# Altium PCB TSAL_ControlV2.1.PcbDoc (part 3 of 3)
Units mm, origin at the board's own origin, x right, y up, seen from the top; angles counter-clockwise.
Board outline 110 x 55.6 mm, 4 copper layers (Top Layer, GND, PWR, Bottom Layer), stack 1.488 mm thick; 168 components, 77 nets, 452 pads, 194 vias.
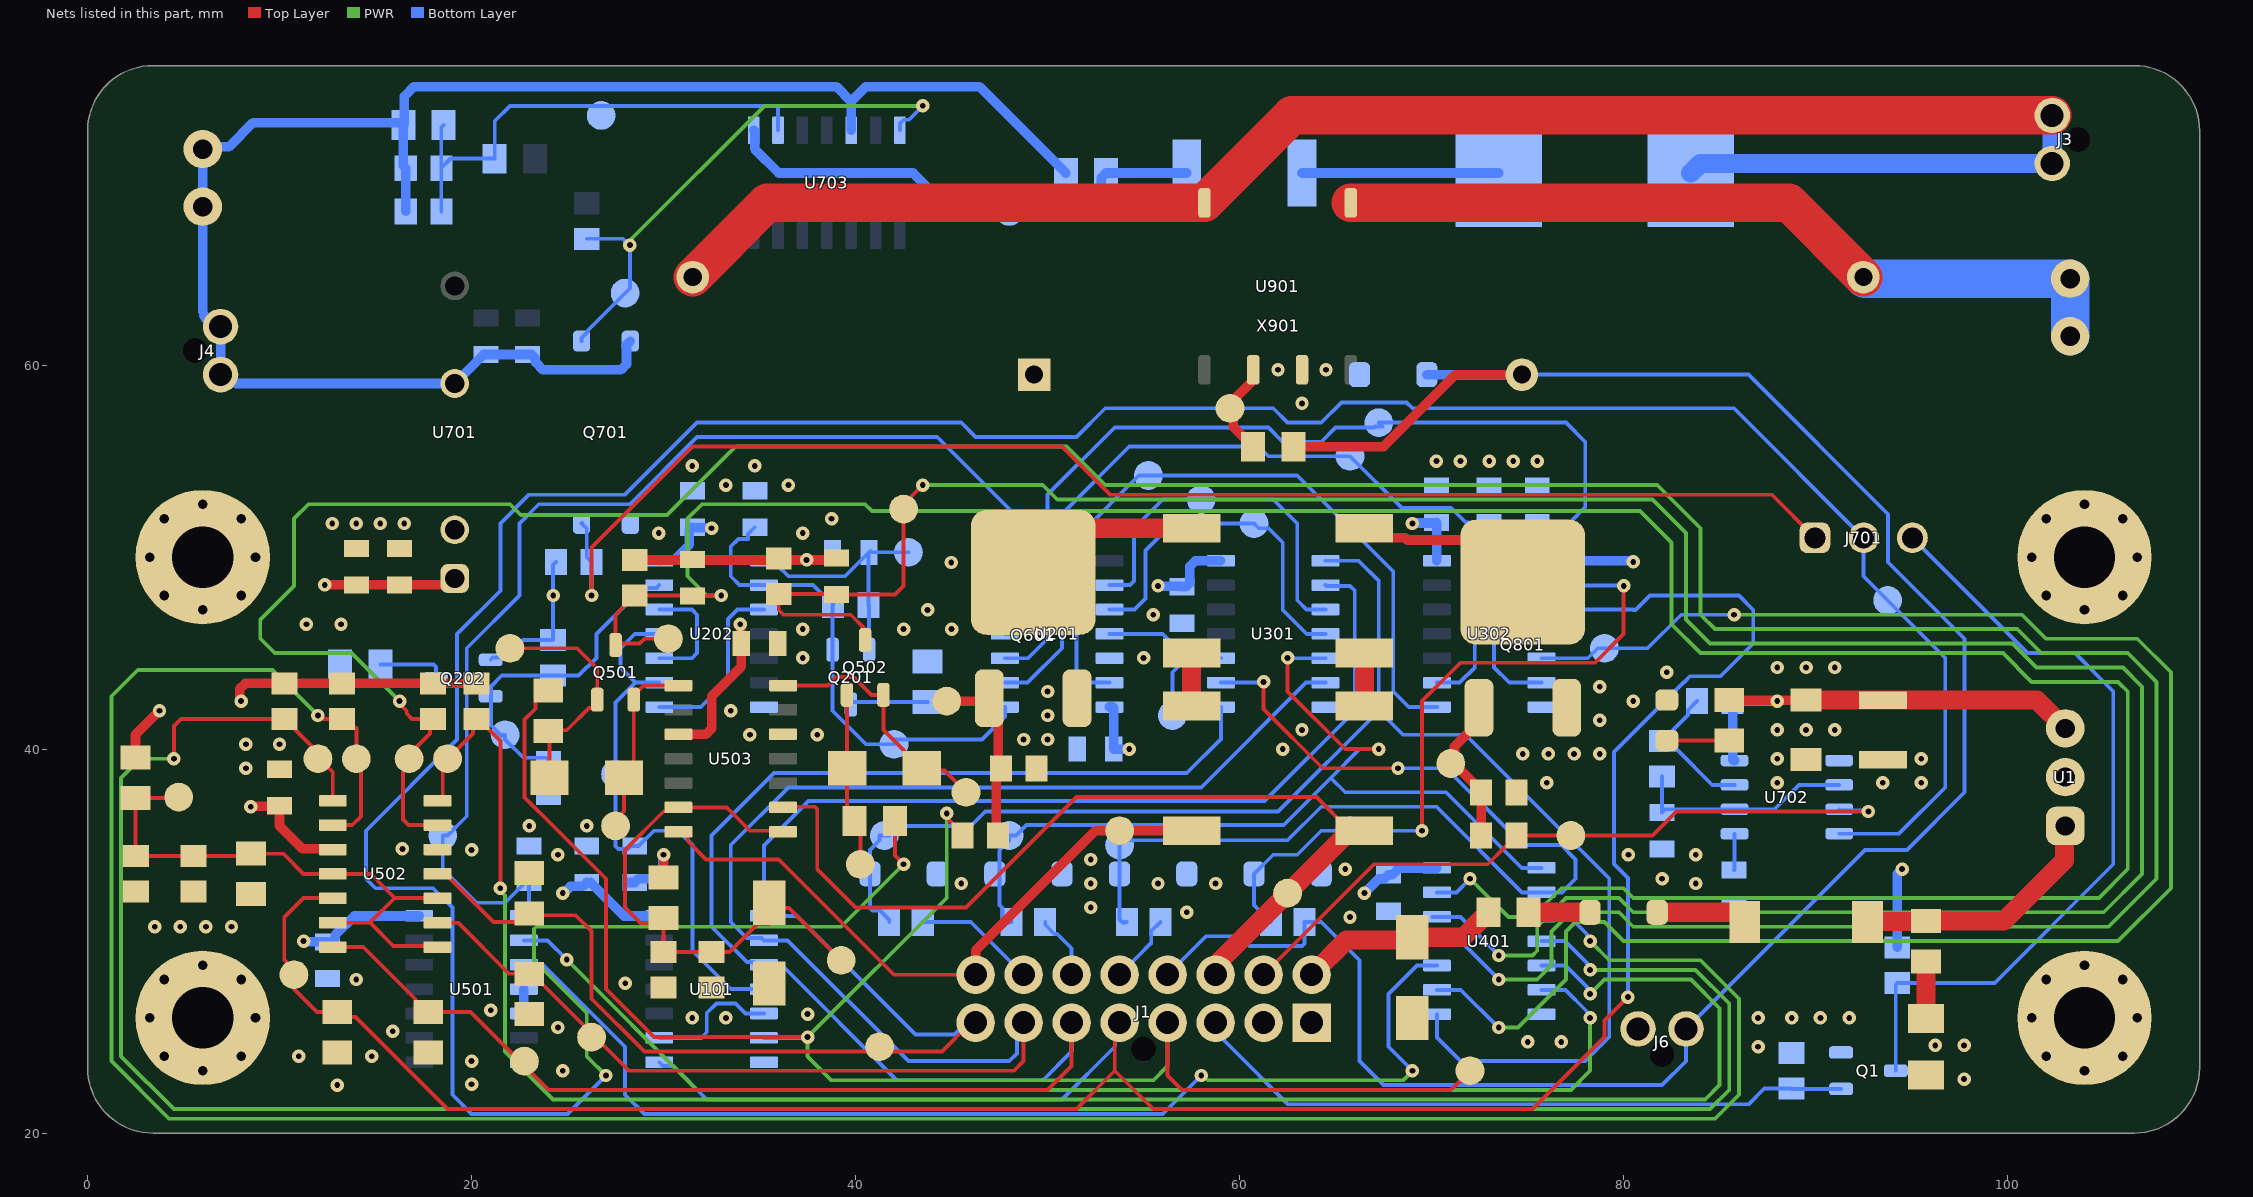
[diagram p4: the nets of this part, all layers, seen from the top]

## Via types
v1: diameter 0.7, hole 0.3, Top Layer to Bottom Layer, tented both sides, 158 vias
v2: diameter 0.7, hole 0.5, Top Layer to Bottom Layer, tented both sides, 32 vias
v3: diameter 1.5, hole 1.5, Top Layer to Bottom Layer, tented both sides, 4 vias

## Nets (pads, with @x,y where several pads share a name; then routed paths per layer and width w, separated by ;. In a path a pad name is that pad's centre, name@x,y a point inside that pad or via, vN(x,y) a via of type N, cw(c..) or ccw(c..) an arc to the next point about the centre after c; other vN are vias at no path point) (continued)
+12: C3.1 C4.1 C101.1 C111.2 C203.1 C204.1 C301.1 C302.1 C401.1 C501.1 C502.1 C503.1 C504.1 C505.1 C703.1 C704.1 J1.7 Q202.G R1.1 R11.1 R202.1 R501.1 R502.1 R503.1 R504.1 R505.1 R511.1 R512.1 R513.1 R702.1 R703.1 U1.3 U101.14 U201.14 U202.14 U301.14 U302.1 U302.14 U401.14 U501.14 U502.3 U503.3 U701.1 U702.8 | length 123.5
  Top Layer w0.5: R505.1@2.5,39.55 2.5,40.75 v1(3.75,42) ; v1(8,42.5) 8,42.554 7.925,42.629 7.925,43.132 8.218,43.425 R502.1@13.25,43.425 R504.1@18,43.425 R503.1@20.25,43.425 ; v1(8.5,37) 8.525,37.025 9.975,37.025 C504.1@10,37.05 10,36 11.18,34.82 12.725,34.82 U502.3@12.775,34.77 ; v1(12.35,48.55) C703.1@14,48.55 C704.1@16.25,48.55 18.795,48.55 U701.1@19.125,48.88 ; R512.1@28.5,49.85 C501.1@31.5,49.85 ; R511.1@30,33.3 v1(30,34.5) ; U503.3@30.775,40.77 32.207,40.77 32.5,41.063 32.5,42.75 34.05,44.3 C505.1@34.05,45.5 34.025,45.525 34.025,46.475 v1(34,46.5) ; C501.1@31.5,49.875 C501.1@31.5,49.85 ; v1@32.5,51.446 v1(32.5,51.5) ; R513.1@36,49.925 R513.1@36,49.85 ; C502.1@39,49.95 38.9,49.85 v1(37.45,49.85) R513.1@36,49.85 ; R11.1@85.5,42.55 C3.1@89.5,42.55 ; C501.1@31.5,49.85 R513.1@36,49.85
  Top Layer w1: C3.1@89.5,42.55 C4.1@93.5,42.55 101.53,42.55 U1.3@103,41.08
  Bottom Layer w0.2: Q202.G@21,44.65 21.115,44.765 21.765,44.765 22.675,45.675 R202.1@24.25,45.675 24.25,47.75 v1(24.25,48) 24.25,49.6 R702.1@24.4,49.75
  Bottom Layer w0.5: v1(11.25,30) 11.275,29.975 12.475,29.975 C503.1@12.5,29.95 12.7,29.95 12.9,30.15 12.9,30.314 13.896,31.31 U501.14@17.275,31.31 ; v1(24.75,32.5) 24.793,32.5 25.143,32.85 25.8,32.85 C101.1@26,33.05 ; C101.1@26.2,33.05 27.94,31.31 U101.14@29.775,31.31 ; C111.2@28.1,33.05 C111.2@28.5,33.05 28.7,33.25 29.4,33.25 29.962,33.812 29.962,34.462 v1(30,34.5) ; U202.14@29.775,49.81 29.825,49.86 30.56,49.86 31.343,50.643 31.343,51.393 C204.1@31.5,51.55 31.525,51.525 32.475,51.525 v1(32.5,51.5) ; U201.14@53.225,42.19 53.4,42.19 53.45,42.14 C203.1@53.45,40 v1(54.25,40) ; v1(55.75,48.5) 55.775,48.475 56.975,48.475 C301.1@57,48.45 57.2,48.45 57.4,48.65 57.4,48.94 57.403,48.943 57.403,49.517 57.696,49.81 U301.14@59.025,49.81 ; v1(66.5,32.5) 67.25,33.25 67.55,33.25 C401.1@67.75,33.45 67.95,33.45 68.31,33.81 U401.14@70.275,33.81 ; v1(69,51.75) 69.025,51.775 70.225,51.775 C302.1@70.25,51.8 70.275,51.775 U302.14@70.275,49.81 ; U302.1@75.725,49.81 80.44,49.81 v1(80.5,49.75) ; U702.8@85.775,39.405 85.725,39.405 85.675,39.455 R703.1@85.675,42.5 v1(88,42.5) ; R1.1@94.25,29.675 94.25,33.5 v1(94.5,33.75)
  other v1: 88,41 89.5,41 91,41 88,44.25 89.5,44.25 91,44.25
AIR+_Coil: A+Coil.1 R3.2 U301.1 U401.8 Z1.K | length 79.1
  Bottom Layer w0.2: R3.2@41.75,31 41.75,31.12 41.275,31.595 40.867,31.595 40.75,31.713 40.75,34.75 41.25,35.25 41.25,35.5 41.767,35.5 42.267,36 46,36 46.75,36.75 62,36.75 67.25,42 ; U301.1@64.475,49.81 66.19,49.81 67.25,48.75 67.25,42 ; U401.8@70.275,26.19 70.275,24.975 71.5,23.75 78,23.75 79.25,25 79.25,33.265 71.765,40.75 68.5,40.75 67.25,42
AIR+_Coil_30V: J1.10 R3.1 | length 6.4
  Bottom Layer w0.2: R3.1@43.5,31 46,31 J1.10@48.75,28.25
AIR+_Implausibility: A+Imp.1 U201.9 U301.3 | length 19.4
  Bottom Layer w0.2: U201.9@53.225,48.54 54.29,48.54 54.5,48.75 54.5,51.5 56,53 A+Imp.1@58,53 61.75,53 63,51.75 63,47.75 63.48,47.27 U301.3@64.475,47.27
AIR+_SCS: A+*.1 R504.2 U401.11 U502.13 | length 185
  Top Layer w0.2: v1(16.25,42.5) 16.25,42.365 16.629,41.986 16.629,41.846 16.9,41.575 R504.2@18,41.575 17.832,41.407 17.832,40.817 16.501,39.487 16.501,38.899 16.425,38.823 16.425,36.325 16.71,36.04 U502.13@18.225,36.04 ; A+*.1@16.57,39.5 A+*.1@16.75,39.5
  PWR w0.2: v1(16.25,42.5) 13.75,45 9.75,45 9,45.75 9,46.75 10.75,48.5 10.75,52 11.5,52.75 22,52.75 22.565,52.185 30.185,52.185 33.75,55.75 51,55.75 53,53.75 81.75,53.75 84,51.5 84,47 84.75,46.25 100.5,46.25 101.75,45 106.25,45 107.75,43.5 107.75,33.25 105.25,30.75 80.5,30.75 79.75,31.5 77.25,31.5 76.25,30.5 76.25,28.75 75.5,28 v1(73.5,28)
  Bottom Layer w0.2: U401.11@70.275,30 71.5,30 v1(73.5,28)
AIR+_State: A+St.1 J1.1 R519.1 U101.1 U301.2 U502.11 | length 94.2
  Top Layer w0.2: U502.11@18.225,33.5 18.65,33.5 21.15,31 22.55,31 R519.1@23,31.45 23.1,31.35 25.418,31.35 26.25,30.518 26.25,27 29,24.25 40.483,24.25 40.484,24.251 41.001,24.251 41.125,24.375 A+St.1@41.25,24.5 ; A+St.1@41.15,24.35 41.249,24.251 42.016,24.251 42.017,24.25 44.5,24.25 46,25.75 J1.1@46.25,25.75
  Bottom Layer w0.2: J1.1@46.25,25.75 45.763,25.75 45.143,25.131 43.119,25.131 36.94,31.31 U101.1@35.225,31.31 35.225,34.975 37.55,37.3 61.3,37.3 66,42 66,48.25 65.75,48.5 64.515,48.5 U301.2@64.475,48.54
AIR-_Coil: A-Coil.1 R5.2 U301.5 U401.1 Z2.K | length 48.9
  Top Layer w0.2: v1(62.5,44.75) 62.5,43 65.5,40 v1(67.25,40)
  Bottom Layer w0.2: Z2.K@47.497,33.253 47.497,34.733 48,35.235 A-Coil.1@48,35.5 48.352,35.5 48.902,36.05 62.3,36.05 64.75,38.5 ; Z2.K@47.5,33.25 47.5,31.875 47.65,31.725 47.65,31.225 47.938,30.937 48,31 R5.2@48.125,31 ; v1(62.5,44.75) 62.52,44.73 U301.5@64.475,44.73 ; v1(67.25,40) 66.25,40 64.75,38.5 ; U401.1@75.725,33.81 74.69,33.81 70.75,37.75 65.5,37.75 64.75,38.5
AIR-_Coil_30V: J1.11 R5.1 | length 3.4
  Bottom Layer w0.2: R5.1@49.875,31 49.875,30.85 50.35,30.375 50.5,30.375 51.25,29.625 J1.11@51.25,28.25
AIR-_Implausibility: A-Imp.1 U201.10 U301.4 | length 19
  Bottom Layer w0.2: U201.10@53.225,47.27 54.52,47.27 55.1,47.85 55.1,50.35 56.5,51.75 A-Imp.1@60.75,51.75 60.999,51.501 61.499,51.501 62.25,50.75 62.25,47.25 63.5,46 U301.4@64.475,46
AIR-_SCS: A-*.1 R503.2 U401.5 U502.14 | length 102.7
  Top Layer w0.2: U502.14@18.225,37.31 18.301,37.31 18.501,37.51 18.501,39.251 20.067,40.817 20.067,41.392 R503.2@20.25,41.575 20.35,41.575 21.5,40.425 v1(21.5,32.75)
  PWR w0.2: v1(21.5,32.75) 21.5,32.633 21.75,32.383 21.75,24.25 24.25,21.75 84.25,21.75 85,22.5 85,26.5 83.5,28 79,28 v1(78.25,27.25)
  Bottom Layer w0.2: U401.5@75.725,28.73 76.97,28.73 78.09,27.61 78.09,27.545 78.25,27.385 v1(78.25,27.25)
AIR-_State: A-St.1 J1.2 R516.1 U101.2 U301.6 U502.9 | length 94.4
  Top Layer w0.2: U502.9@18.225,30.96 19.29,30.96 21.95,28.3 23.15,28.3 26.25,25.2 26.25,25.1 A-St.1@26.25,25 26.35,25.1 28.2,23.25 48.25,23.25 48.75,23.75 J1.2@48.75,25.75
  Bottom Layer w0.2: J1.2@48.75,25.75 48.406,25.406 48.406,24.156 48,23.75 42.75,23.75 36.46,30.04 U101.2@35.225,30.04 35.098,30.167 34.333,30.167 33.5,31 33.5,35 36.5,38 58,38 63.46,43.46 U301.6@64.475,43.46
Discharge_Resistor: J2.1 J2.2 U901.5 X901.1 | length 42.1
  Top Layer w2: U901.5@65.79,68.45 88.61,68.45 X901.1@92.48,64.58
  Bottom Layer w2: X901.1@92.48,64.58 92.56,64.5 J2.2@103.25,64.5 J2.1@103.25,61.5
GateGREEN_DRV: GGreen.1 Q601.G R601.2 R602.1 | length 9.8
  Top Layer w0.5: GGreen.1@44.75,42.5 46.814,42.5 Q601.G@46.964,42.65 46.964,41.832 47.425,41.371 47.425,39.15 R602.1@47.575,39 47.325,38.75 47.325,35.6 R601.2@47.425,35.5
GateGREEN_SCS: GGreen*.1 Q501.G R509.2 Z501.K | length 12.4
  Top Layer w0.2: GGreen*.1@22,45.25 25.5,45.25 26.55,44.2 Q501.G@26.55,42.575 26.55,42.356 26.33,42.135 26.11,42.135 24.958,40.983 24.033,40.983 R509.2@24,40.95 24.06,40.89 Z501.K@24.06,38.5
GateRED_DRV: GRed.1 Q801.G R801.2 R802.1 | length 8.1
  Top Layer w0.5: Q801.G@72.464,42.15 72.464,41.4 71.191,40.127 71.191,39.441 GRed.1@71,39.25 71.175,39.25 R802.1@72.575,37.85 ; R801.2@72.575,35.5 R802.1@72.575,37.85 ; R802.1@72.575,37.75 R802.1@72.575,37.85
GateRED_SCS: GRed*.1 Q502.G R510.1 Z502.K | length 9.1
  Top Layer w0.2: Q502.G@39.55,42.825 39.55,42.575 39.56,42.565 Z502.K@39.56,39 39.56,36.64 R510.1@39.95,36.25 40.25,35.95 GRed*.1@40.25,34
GND: C1.2 C3.2 C4.2 C101.2 C201.2 C202.2 C203.2 C204.2 C223.2 C301.2 C302.2 C333.2 C401.2 C444.2 C503.2 C504.2 C505.2 C555.2 C703.2 C704.2 C705.2 C706.2 D1.2 D3.K D901.A J1.8 J6.1 MH1.1 MH2.1 MH3.1 MH4.1 Q1.S Q601.S Q701.3 Q801.S R2.2 R203.2 R204.2 R506.2 R507.2 R508.2 R514.2 R515.2 R516.2 R517.2 R518.2 R519.2 R602.2 R802.2 U1.2 U101.7 U201.5 U201.7 U201.12 U202.7 U301.7 U302.7 U401.7 U501.4 U501.5 U501.7 U502.12 U503.12 U701.2 U702.1 U901.3 X901.3 Z1.A Z2.A Z3.A Z4.A Z503.A | length 1.3
  Bottom Layer w0.5: U501.5@22.725,26.23 U501.4@22.725,27.5
  other v1: 13,22.5 20,22.55 97.732,22.816 24.75,23.25 20,23.75 11,24 14.8,24 87,24.5 96.232,24.566 97.732,24.566 75,24.75 76.75,24.75 15.9,25.3 24.5,25.5 31.5,26 33.25,26 87,26 88.75,26 90.25,26 91.75,26 37.5,26.2 21,26.4 28,27.8 14,28 3.5,30.75 4.833,30.75 6.167,30.75 7.5,30.75 65.75,31.25 57.25,31.5 52.25,31.75 45.5,33 52.25,33 55.75,33 58.75,33 83.75,33 82,33.25 65.5,33.75 52.25,34.25 24.5,34.5 80.25,34.5 83.75,34.5 20,34.75 16.4,34.8 23,36 26,36 76,38.25 88,38.25 93.5,38.25 95.5,38.25 8.25,39 88,39.5 95.5,39.5 74.75,39.75 76.083,39.75 77.417,39.75 78.75,39.75 62.25,40 8.25,40.25 10,40.25 48.75,40.5 50,40.5 34.5,40.75 38,40.75 63.25,41 78.75,41.5 50,41.75 33.5,42 80.5,42.5 50,43 78.75,43.25 82.25,44 37.25,44.75 55,44.75 37.25,46.25 42.5,46.25 45,46.25 11.4,46.5 13.2,46.5 55.5,47 43.75,47.25 44.977,49.717 29.75,51.25 37.25,51.25 12.75,51.75 14,51.75 15.25,51.75 16.5,51.75 38.75,52 33.25,53.75 36.5,53.75 31.5,54.75 34.75,54.75 70.25,55 71.5,55 73,55 74.25,55 75.5,55 63.25,58 62,59.75 64.5,59.75
  other v2: 6,23.25 104,23.25 4,24 8,24 102,24 106,24 3.25,26 8.75,26 101.25,26 106.75,26 4,28 8,28 102,28 106,28 6,28.75 104,28.75 6,47.25 104,47.25 4,48 8,48 102,48 106,48 3.25,50 8.75,50 101.25,50 106.75,50 4,52 8,52 102,52 106,52 6,52.75 104,52.75
GreenDRV_SCS: C501.2 GreenDRV.1 Q501.D R512.2 U401.13 | length 145.3
  Top Layer w0.2: GreenDRV.1@30.25,45.75 29.004,45.75 28.754,45.5 27.575,45.5 Q501.D@27.5,45.425 27.5,47 27.925,47.425 27.925,47.525 28.4,48 R512.2@28.5,48 31.475,48 C501.2@31.5,47.975 32.975,47.975 v1(33,48)
  PWR w0.2: v1(33,48) 32.25,48 31.25,49 31.25,52 32,52.75 40.5,52.75 40.85,52.4 80.85,52.4 82.5,50.75 82.5,46.5 84,45 99.75,45 101.25,43.5 105.75,43.5 106.25,43 106.25,33.75 104.75,32.25 80.5,32.25 80,32.75 76.75,32.75 75.25,31.25 74,31.25 v1(72,33.25)
  Bottom Layer w0.2: U401.13@70.275,32.54 71.29,32.54 v1(72,33.25)
HV_Accu_SCS: HVAcc*.1 R502.2 U401.3 U502.2 | length 143.6
  Top Layer w0.2: v1(12,41.75) 12.135,41.75 12.31,41.575 R502.2@13.25,41.575 13.725,41.1 14,41.1 14,40.267 14.001,40.266 14.001,39.501 HVAcc*.1@14,39.5 14.063,39.437 14.249,39.251 14.249,36.499 13.79,36.04 U502.2@12.775,36.04
  PWR w0.2: v1(12,41.75) 9.635,44.115 2.615,44.115 1.25,42.75 1.25,23.75 4.25,20.75 84.75,20.75 86,22 86,27 84,29 79.25,29 v1(78.25,30)
  Bottom Layer w0.2: U401.3@75.725,31.27 77.18,31.27 78.09,30.36 78.09,30.295 78.25,30.135 v1(78.25,30)
HV_Accumulator: HVAcc.1 J1.4 R518.1 U101.8 U302.3 U502.5 | length 149.2
  Top Layer w0.2: U502.5@12.775,32.23 12.755,32.25 11.25,32.25 10.25,31.25 10.25,29.017 10.75,28.517 10.75,27.5 11.95,26.3 R518.1@13,26.3 13.258,26.042 13.958,26.042 18.75,21.25 51.5,21.25 53.5,23.25 ; J1.4@53.75,25.75 53.5,25.5 53.5,23.25 ; v1(80.222,27.084) 79,25.862 79,25 75.25,21.25 55.5,21.25 53.5,23.25
  Bottom Layer w0.2: U101.8@29.775,23.69 29.975,23.49 30.51,23.49 32.25,21.75 50.75,21.75 53.5,24.5 53.5,25.5 J1.4@53.75,25.75 ; U302.3@75.725,47.27 80.48,47.27 80.5,47.25 80.619,47.25 81.369,48 86,48 86.75,47.25 86.75,45.5 85.04,43.79 83.46,43.79 83.144,43.475 83.126,43.475 79.5,39.849 79.5,34.013 80.222,33.292 v1(80.222,27.084)
HV_Detection_DCBus: J701.1 Q701.4 R702.2 | length 74.3
  Top Layer w0.2: v1(26.25,48) 26.25,50.5 31.5,55.75 50.75,55.75 53.25,53.25 87.71,53.25 J701.1@89.96,51
  Bottom Layer w0.2: Q701.4@25.75,51.77 Q701.4@25.73,51.75 26,51.48 26,50 R702.2@26.25,49.75 v1(26.25,48)
HV_Detection_Trigger: HVDetTrg.1 J701.2 R510.2 U702.4 | length 176.8
  Top Layer w0.2: R510.2@42.05,36.25 42.05,34.45 v1(42.5,34)
  PWR w0.2: v1(27,23) 26,24 26,26.25 23.25,29 23.25,30.633 23.367,30.75 39.25,30.75 v1(42.5,34)
  Bottom Layer w0.2: v1(27,23) 25,21 20,21 19,22 19,31.75 18,32.75 15,32.75 14.5,33.25 14.5,35.75 19.25,40.5 19.25,46 21.5,48.25 21.5,51.75 23,53.25 28,53.25 31.75,57 45.5,57 46.25,56.25 51.5,56.25 53,57.75 61.75,57.75 62.5,57 64.25,57 65.3,58.05 68.7,58.05 69,57.75 85.75,57.75 J701.2@92.5,51 92.5,49 HVDetTrg.1@93.75,47.75 96.75,44.75 96.75,38 94.345,35.595 U702.4@91.225,35.595
Implausibilities: C201.1 Imp.1 Q201.S R201.2 U202.1 | length 13.4
  Bottom Layer w0.2: U202.1@35.225,49.81 35.425,49.61 35.89,49.61 36.5,49 39.45,49 C201.1@40.675,50.225 ; Q201.S@40.7,45.175 40.7,47.475 R201.2@40.675,47.5 C201.1@40.675,50.225 ; C201.1@40.766,50.316 C201.1@40.7,50.25 C201.1@40.675,50.225 ; C201.1@40.833,50.25 Imp.1@42.75,50.25
Implausibilities_Undelayed: C223.1 ImpUnd.1 Q201.G R201.1 U201.1 U202.2 | length 25.6
  Bottom Layer w0.2: C223.1@34.75,51.55 34.4,51.2 34.4,50.95 33.9,50.95 33.5,50.55 33.5,49 33.96,48.54 U202.2@35.225,48.54 37.785,48.54 38.25,48.075 38.35,48.075 38.825,47.6 R201.1@38.825,47.5 38.8,47.475 Q201.G@38.8,45.175 38.8,41.996 40.546,40.25 ImpUnd.1@42,40.25 ; ImpUnd.1@42,40.5 46.581,40.5 47.775,41.694 U201.1@47.775,42.19
INV_HV_Detection: J701.3 Q1.D R1.2 | length 41.2
  Bottom Layer w0.2: Q1.D@94.175,23.25 94.175,27.75 R1.2@94.25,27.825 99.325,27.825 105.5,34 105.5,43 103.5,45 101.04,45 J701.3@95.04,51
INV_HV_Detection5V: J1.6 Q1.G R2.1 | length 35
  Bottom Layer w0.2: J1.6@58.75,25.75 58.75,25.272 59.553,24.469 62.522,21.5 86.5,21.5 87.325,22.325 R2.1@88.75,22.325 88.775,22.3 Q1.G@91.325,22.3
Latch_Reset: C202.1 LtchRst.1 Q202.S R202.2 U202.13 | length 17.6
  Bottom Layer w0.2: C202.1@24,39.45 23.9,39.55 22.7,39.55 21.75,40.5 LtchRst.1@21.75,40.75 21.625,40.75 21.563,40.688 21.008,41.242 21.008,42.742 Q202.S@21,42.75 21.008,42.758 21.008,43.258 21.575,43.825 R202.2@24.25,43.825 25.575,43.825 26.5,44.75 26.5,46 28.898,48.398 29.633,48.398 U202.13@29.775,48.54
LV+_in: D1.1 F1.1 J1.16 | length 10.6
  Top Layer w1: J1.16@63.75,28.25 65.562,30.062 68.862,30.062 D1.1@69,30.2 71.65,30.2 72.675,31.225 72.825,31.225 72.95,31.35 F1.1@72.95,31.5
NetC1_1: C1.1 R10.2 | length 3
  Top Layer w1: C1.1@95.75,25.976 R10.2@95.75,28.95
NetC705_1: C705.1 U702.5 | length 1.9
  Bottom Layer w0.2: C705.1@85.75,33.7 85.775,33.725 U702.5@85.775,35.595
NetC706_1: C706.1 R706.2 U702.2 U702.6 | length 11.7
  Bottom Layer w0.2: R706.2@82,38.575 C706.1@82,36.7 82.165,36.865 U702.6@85.775,36.865 87.865,36.865 89.135,38.135 U702.2@91.225,38.135
NetCntlOptRly_1: CntlOptRly.1 R901.2 U901.2 | length 5.1
  Top Layer w0.5: R901.2@60.7,55.75 60.7,55.9 60.325,56.275 60.175,56.275 59.661,56.789 59.661,57.589 CntlOptRly.1@59.5,57.75 59.5,58 60.635,59.135 60.635,59.675 U901.2@60.71,59.75
NetD2_A: D2.A F1.2 | length 3.2
  Top Layer w1: F1.2@75.05,31.5 D2.A@78.25,31.5
NetD2_K: D2.K L1.1 | length 4.9
  Top Layer w1: D2.K@81.75,31.5 86,31.5 86.3,31.2 L1.1@86.3,31
NetD3_A: D3.A R11.2 | length 3.3
  Top Layer w0.2: D3.A@82.25,40.45 R11.2@85.5,40.45
NetL1_2: L1.2 R10.1 U1.1 | length 13.4
  Top Layer w1: L1.2@92.7,31 92.725,31.025 95.725,31.025 R10.1@95.75,31.05 99.8,31.05 102.961,34.211 102.961,35.961 U1.1@103,36
NetQ201_D: Q201.D R203.1 | length 4.1
  Bottom Layer w0.2: Q201.D@39.75,42.325 39.875,42.45 R203.1@43.75,42.45
NetQ202_D: Q202.D R204.1 | length 3.5
  Bottom Layer w0.2: R204.1@15.25,44.4 18.033,44.4 18.15,44.283 Q202.D@18.15,43.7
NetQ601_D: Q601.D R604.2 | length 9.2
  Top Layer w1: Q601.D@49.25,49.2 51.55,51.5 R604.2@57.5,51.5
NetQ801_D: Q801.D R804.2 | length 9.4
  Top Layer w0.5: R804.2@66.5,51.5 67,51 68.619,51 68.731,50.888 72.562,50.888 Q801.D@74.75,48.7
NetR603_2: R603.2 R604.1 | length 2.7
  Top Layer w1: R603.2@57.5,42.25 R604.1@57.5,45
NetR703_2: R703.2 R706.1 U702.7 | length 7.6
  Bottom Layer w0.2: R703.2@83.825,42.5 83.35,42.025 83.35,41.775 82.575,41 82.575,40.9 82.1,40.425 R706.1@82,40.425 82.475,39.95 82.8,39.95 84.615,38.135 U702.7@85.775,38.135
NetR803_2: R803.2 R804.1 | length 2.7
  Top Layer w1: R803.2@66.5,42.25 R804.1@66.5,45
NetU101_5: U101.5 U101.9 | length 7
  Bottom Layer w0.2: U101.9@29.775,24.96 31.96,24.96 32.25,25.25 32.25,26.25 32.75,26.75 33.75,26.75 34.27,26.23 U101.5@35.225,26.23
No_Voltage_Relays_Closed: C444.1 NHVRlyCls.1 U201.3 U302.6 | length 58.4
  Bottom Layer w0.2: U201.3@47.775,44.73 48.98,44.73 50,45.75 50,53.25 53.5,56.75 61.5,56.75 62.25,56 64.25,56 65,56.75 NHVRlyCls.1@67,56.75 ; NHVRlyCls.1@67.05,56.8 NHVRlyCls.1@67.45,56.8 ; NHVRlyCls.1@67.25,57 77,57 78,56 78,52.6 77.2,51.8 75.3,51.8 73.25,49.75 73.25,44.25 74.04,43.46 U302.6@75.725,43.46
Not_Intentional_Relay_State: NIntRlySt.1 U302.5 U401.9 | length 90.5
  PWR w0.2: v1(73.5,25.5) 74.5,25.5 77,28 77,30.5 77.5,31 79,31 80,30 105.75,30 108.5,32.75 108.5,44 106.75,45.75 102,45.75 100.75,47 v1(85.75,47)
  Bottom Layer w0.2: U401.9@70.275,27.46 71.52,27.46 73.48,25.5 v1(73.5,25.5) ; U302.5@75.725,44.73 78.128,44.73 78.648,45.25 NIntRlySt.1@79,45.25 81.25,45.25 83,47 v1(85.75,47)
Not_Safe_State: U202.10 U202.12 | length 6.2
  Bottom Layer w0.2: U202.10@29.775,44.73 31.48,44.73 31.75,45 31.75,47 31.48,47.27 U202.12@29.775,47.27
Out_HV_Comparator: OutHV.1 Q701.1 R701.2 U703.14 | length 28.5
  PWR w0.2: v1@28.204,66.454 28.319,66.454 28.346,66.481 28.346,66.596 35.25,73.5 v1(43.5,73.5)
  Bottom Layer w0.2: Q701.1@25.73,61.25 25.73,61.418 26.061,61.749 26.061,61.811 28.249,63.999 28.249,64.516 28.25,64.517 v1(28.25,66.25) ; R701.2@26,66.575 27.883,66.575 28,66.458 v1@28,66.25 ; U703.14@42.31,72.225 42.31,72.577 42.51,72.777 42.777,72.777 v1(43.5,73.5)
Precharge_Coil: PreCoil.1 R7.2 U301.9 U401.2 Z3.K | length 55.2
  Top Layer w0.2: v1(61.25,43.5) 61.25,42.081 64.331,39 v1(68.25,39)
  Bottom Layer w0.2: R7.2@54.125,31 54,31 53.938,30.937 53.75,31.125 Z3.K@53.75,33.5 PreCoil.1@53.75,35 53.999,35.249 54.516,35.249 54.517,35.25 62.5,35.25 64.25,37 70.25,37 74.71,32.54 U401.2@75.725,32.54 76.79,32.54 77.5,33.25 77.5,34.25 76.75,35 74.75,35 70.75,39 v1(68.25,39) ; U301.9@59.025,43.46 61.21,43.46 v1(61.25,43.5)
Precharge_Coil_30V: J1.12 R7.1 | length 3.6
  Bottom Layer w0.2: J1.12@53.75,28.25 54.75,29.25 54.75,29.258 55.367,29.875 55.4,29.875 55.4,30.525 R7.1@55.875,31
Precharge_Implausibility: PreImp.1 U201.11 U301.10 | length 9.6
  Bottom Layer w0.2: U201.11@53.225,46 56,46 57.25,44.75 ; PreImp.1@56.5,41.75 56.5,44 57.25,44.75 ; U301.10@59.025,44.73 59.005,44.75 57.25,44.75
Precharge_SCS: Pre*.1 R501.2 U401.4 U502.1 | length 131.7
  Top Layer w0.2: v1(4.5,39.5) 4.5,41.208 4.867,41.575 10.35,41.575 10.825,41.1 10.825,41 12,39.825 Pre*.1@12,39.5 12.075,39.5 12.775,38.8 U502.1@12.775,37.31
  PWR w0.2: v1(4.5,39.5) 2.75,39.5 1.75,38.5 1.75,24 4.5,21.25 84.5,21.25 85.5,22.25 85.5,26.75 83.75,28.5 v1(78.25,28.5)
  Bottom Layer w0.2: U401.4@75.725,30 76.95,30 78.09,28.86 78.09,28.795 78.25,28.635 v1(78.25,28.5)
Precharge_State: J1.3 PreSt.1 R517.1 U101.3 U301.8 U502.7 | length 103.6
  Top Layer w0.2: U502.7@12.775,29.69 14.36,29.69 17.075,26.975 17.075,26.825 17.6,26.3 19.95,26.3 22.625,23.625 24,22.25 50,22.25 51.25,23.5 J1.3@51.25,25.75
  Bottom Layer w0.2: J1.3@51.25,25.75 51.25,24.25 49.75,22.75 42.153,22.75 36.133,28.77 34.8,28.77 34.663,28.907 34.343,28.907 32.5,30.75 32.5,35.5 35.75,38.75 57.25,38.75 59.025,40.525 U301.8@59.025,42.19
RedDRV_SCS: C502.2 Q502.D R513.2 RedDRV.1 U401.12 | length 139.5
  Top Layer w0.2: Q502.D@40.5,45.675 40.5,46.25 39.75,47 36.25,47 36,47.25 R513.2@36,48.075 38.975,48.075 C502.2@39,48.05 42.05,48.05 42.5,48.5 42.5,52.75 v1(43.5,53.75)
  PWR w0.2: v1(43.5,53.75) 49.75,53.75 50.5,53 81.5,53 83.25,51.25 83.25,46.75 84.5,45.5 100.25,45.5 101.5,44.25 106,44.25 107,43.25 107,33.5 105,31.5 80.5,31.5 79.75,32.25 77,32.25 75.5,30.75 75.5,29.5 75.25,29.25 v1(73.5,29.25)
  Bottom Layer w0.2: U401.12@70.045,31.25 71.5,31.25 v1@73.27,29.48
Relays_Implausibility: C333.1 RlyImp.1 U201.2 U302.9 | length 46.2
  Bottom Layer w0.2: U201.2@47.775,43.46 48.96,43.46 50.75,45.25 50.75,52.25 54.25,55.75 61,55.75 61.5,55.25 RlyImp.1@65.75,55.25 68.45,52.55 71.024,52.55 71.774,51.8 C333.1@73,51.8 73,51 72.25,50.25 72.25,44.25 71.46,43.46 U302.9@70.275,43.46
Relays_State_Detection: RlySt.1 U201.13 U302.8 | length 37.7
  Bottom Layer w0.2: U201.13@53.225,43.46 52.04,43.46 51.5,44 51.5,51 54.75,54.25 63,54.25 68,49.25 68,43 68.81,42.19 U302.8@70.275,42.19
Safe_State: C111.1 SfSt.1 U101.4 U202.9 U202.11 | length 29.4
  Bottom Layer w0.2: U202.9@29.775,43.46 28.54,43.46 ; U202.11@29.775,46 28.5,46 27.75,45.25 27.75,44.25 28.54,43.46 ; U101.4@35.225,27.5 34.25,27.5 33.5,27.5 31.5,29.5 31.5,35 30.75,35.75 29.5,35.75 28.7,34.95 28.3,34.95 28.15,34.8 27.65,34.8 27.5,34.95 SfSt.1@27.5,38.685 27.5,42.42 28.54,43.46
Safe_State_Unlatched: U202.3 U202.8 | length 9.4
  Bottom Layer w0.2: U202.8@29.775,42.19 31.94,42.19 33.393,43.643 33.35,43.687 33.35,46.769 33.851,47.27 U202.3@35.225,47.27
SC_End: R9.2 SCEnd.1 U302.2 U302.4 Z4.K | length 43
  Top Layer w0.2: v1(69.5,35.75) 69.5,42.5 71.5,44.5 78.5,44.5 80,46 v1(80,48.5)
  Bottom Layer w0.2: R9.2@61.625,31 61.625,31.15 61.15,31.625 61,31.625 60.75,31.875 Z4.K@60.75,33.5 61.75,34.5 63,34.5 64.25,35.75 v1(69.5,35.75) ; U302.4@75.725,46 74.75,46 74.25,46.5 74.25,48 74.79,48.54 U302.2@75.725,48.54 75.745,48.52 79.98,48.52 v1(80,48.5)
SC_End_30V: D901.K J1.13 J6.2 R9.1 R901.1 X901.2 | length 114.2
  Top Layer w0.5: R901.1@62.8,55.75 67.5,55.75 71.25,59.5 X901.2@74.7,59.5
  Bottom Layer w0.2: J1.13@56.25,28.25 58.25,30.25 60,30.25 60.5,29.75 63.258,29.75 63.375,29.867 R9.1@63.375,31 64.25,31 66.25,29 66.25,23.75 67.5,22.5 82.006,22.5 83.25,23.744 J6.2@83.25,25.43 92.57,34.75 94.75,34.75 97.75,37.75 97.75,45.75 93.886,49.614 93.768,49.731 93.768,52.232 86.5,59.5 X901.2@74.7,59.5
  Bottom Layer w0.5: D901.K@69.75,59.5 X901.2@74.7,59.5
SCS_Error: C555.1 SCSErr.1 U201.4 U501.1 | length 64.5
  Bottom Layer w0.2: U501.1@22.725,31.31 22.8,31.31 23,31.51 C555.1@23,33.05 22.8,33.05 21.75,32 20.25,32 18.5,33.75 SCSErr.1@18.5,35.5 18.75,35.5 19.75,36.5 19.75,45.25 22.5,48 22.5,51.75 23.5,52.75 28.25,52.75 31.75,56.25 44.25,56.25 49.25,51.25 49.25,46.5 48.75,46 U201.4@47.775,46
SCS_Signals1: U401.6 U501.2 | length 65.2
  PWR w0.2: v1(24.96,29.04) 31.75,22.25 77.25,22.25 78.25,23.25 v1(78.25,26)
  Bottom Layer w0.2: U501.2@22.725,30.04 23.96,30.04 v1(24.96,29.04) ; U401.6@75.725,27.46 76.97,27.46 78.08,26.35 78.08,26.305 78.25,26.135 v1(78.25,26)
SCS_Signals2: U401.10 U501.3 | length 59.8
  PWR w0.2: v1(58,23) 58.117,23 58.367,22.75 68.5,22.75 v1(69,23.25)
  Bottom Layer w0.2: U501.3@22.725,28.77 23.73,28.77 28,24.5 28,22 29,21 56,21 v1(58,23) ; v1(69,23.25) 67.75,24.5 67.75,27.25 69.23,28.73 U401.10@70.275,28.73
SourceGREEN_SCS: Q501.S SGreen*.1 U503.1 Z501.A | length 9.8
  Top Layer w0.2: SGreen*.1@27.5,36 27.5,36.327 27.94,36.767 Z501.A@27.94,38.5 28.45,39.01 28.45,42.841 28.709,43.1 28.756,43.1 28.966,43.31 U503.1@30.775,43.31
SourceRED_SCS: Q502.S SRed*.1 U503.14 Z502.A | length 13.6
  Top Layer w0.2: U503.14@35.972,43.31 38.56,43.31 39,43.75 39.904,43.75 40.365,43.29 40.365,43.285 40.825,42.825 Q502.S@41.45,42.825 41.45,40.99 42.54,39.9 42.54,39.8 43.34,39 Z502.A@43.44,39 43.563,38.877 44.623,38.877 SRed*.1@45.75,37.75
TS+_DCBus1: F3.1 R705.1 | length 10.3
  Bottom Layer w0.5: R705.1@63.25,70 F3.1@73.5,70
TS+_DCBus1_Unfused: F3.2 J3.1 J3.2 U901.6 X901.4 | length 95.8
  Top Layer w2: X901.4@31.52,64.58 35.39,68.45 U901.6@58.17,68.45 62.72,73 J3.2@102.32,73
  Bottom Layer w1: F3.2@83.5,70 84,70.5 J3.1@102.32,70.5 J3.2@102.32,73
TS-: C701.2 C702.2 J4.1 J4.2 J5.1 J5.2 Q701.2 R707.2 R708.2 R709.2 R710.2 U701.3 U703.12 | length 92
  Bottom Layer w0.5: R709.2@16.575,68 R710.2@16.575,70.25 16.45,70.375 R708.2@16.45,72.5 ; Q701.2@28.27,61.25 28.07,61.05 28.07,60.043 27.777,59.75 23.721,59.75 23.321,60.15 23.321,60.35 23.121,60.55 20.635,60.55 U701.3@19.125,59.04 7.755,59.04 7.295,59.5 J4.2@6.93,59.5 J4.1@6.93,62 cw(c6.93,62.93) 6,62.93 J5.2@6,68.25 J5.1@6,71.25 6.112,71.362 7.362,71.362 8.625,72.625 16.45,72.625 R708.2@16.45,72.5 ; U703.12@39.77,72.225 39.77,73.73 ; R707.2@50.95,70 46.45,74.5 40.54,74.5 39.77,73.73 ; R708.2@16.45,72.5 16.5,72.55 16.5,74 17,74.5 39,74.5 39.77,73.73
TS_Off: J1.5 R509.1 R601.1 TSOff.1 U101.6 | length 89.9
  Top Layer w0.2: R509.1@24,43.05 23.85,43.05 23.325,42.525 23.325,42.099 22.76,41.534 22.76,37.476 23.486,36.75 23.5,36.75 27,33.25 27,27.5 29.5,25 v1(37.5,25) ; v1(44.75,36.65) 44.846,36.554 44.846,36.329 45.575,35.6 R601.1@45.575,35.5 ; J1.5@56.25,25.75 56.25,23 57,22.25 71,22.25 TSOff.1@72,23.25
  PWR w0.2: v1(44.75,36.65) 44.75,32.25 v1(37.5,25) 37.5,24 38.75,22.75 55.5,22.75 56.25,23.5 J1.5@56.25,25.75
  Bottom Layer w0.2: U101.6@35.225,24.96 37.46,24.96 v1(37.5,25)
TS_On: J1.15 R801.1 TSOn.1 U702.3 | length 36.7
  Top Layer w0.2: J1.15@61.25,28.25 67,34 72.925,34 73.85,34.925 73.95,34.925 74.425,35.4 R801.1@74.425,35.5 TSOn.1@77.25,35.5 81.5,35.5 82.75,36.75 v1(92.75,36.75)
  Bottom Layer w0.2: U702.3@91.225,36.865 91.283,36.808 92.692,36.808 v1(92.75,36.75)
TSAL_Green: J1.9 R603.1 TSALGrn.1 U503.7 | length 33.8
  Top Layer w0.2: U503.7@30.775,35.69 31.058,35.69 31.258,35.49 31.258,35.207 32.215,34.25 36,34.25 42,28.25 J1.9@46.25,28.25
  Top Layer w0.5: J1.9@46.25,28.25 46.25,29.5 52.5,35.75 TSALGrn.1@53.75,35.75 R603.1@57.5,35.75
TSAL_Red: J1.14 R803.1 TSALRed.1 U503.9 | length 47.3
  Top Layer w0.2: U503.9@36.225,36.96 36.265,37 37.883,37 38,36.883 38,33.75 40,31.75 45.75,31.75 51.5,37.5 64,37.5 65.75,35.75 R803.1@66.5,35.75
  Top Layer w1: J1.14@58.75,28.75 TSALRed.1@62.5,32.5 R803.1@65.75,35.75
V_REF: R505.2 R506.1 R507.1 R508.1 U502.4 U502.6 U502.8 U502.10 VRef.1 | length 29.8
  Top Layer w0.2: VRef.1@4.75,37.5 4.7,37.45 R505.2@2.5,37.45 2.5,34.44 R508.1@2.515,34.425 R507.1@5.515,34.425 8.39,34.425 R506.1@8.515,34.55 10.2,34.55 11.25,33.5 U502.4@12.775,33.5 14.75,33.5 16,32.25 ; U502.6@12.775,30.96 14.71,30.96 ; U502.8@18.225,29.69 18.165,29.75 15.92,29.75 14.71,30.96 ; U502.10@18.225,32.23 18.205,32.25 16,32.25 ; 14.71,30.96 16,32.25
V_REF_Drivers: R511.2 R514.1 R515.1 U503.6 U503.8 VRefDRV.1 Z503.K | length 29
  Top Layer w0.2: R511.2@30,31.2 R511.2@30,30.95 ; U503.8@36.225,35.69 36.165,35.75 34.5,35.75 33.29,36.96 U503.6@30.775,36.96 30.575,36.76 30.01,36.76 28,34.75 28,31.75 28.8,30.95 R511.2@30,30.95 ; VRefDRV.1@39.25,29 36.533,31.717 35.783,31.717 Z503.K@35.5,32 35.5,30.892 34.892,30.892 33.425,29.425 R514.1@32.5,29.425 R515.1@30,29.425 R511.2@30,30.95
Voltage_DCBus1: R705.2 R707.1 U703.8 VDCBus.1 | length 26.2
  Bottom Layer w0.5: U703.8@34.69,72.225 34.74,72.175 34.74,71.26 36,70 43,70 45,68 52,68 52.795,68.795 52.795,69.745 R707.1@53.05,70 R705.2@57.25,70
VREF_HV_Detection: R704.2 R708.1 R709.1 R710.1 U703.9 VRefHV.1 | length 27.2
  Bottom Layer w0.2: R709.1@18.425,68 R710.1@18.425,70.25 ; R708.1@18.55,72.5 18.425,72.375 R710.1@18.425,70.25 ; U703.9@35.96,72.225 35.96,73.383 35.843,73.5 22,73.5 21.208,72.708 21.208,70.758 R704.2@21.2,70.75 R710.1@18.9,70.75 ; R710.1@18.425,70.25 R710.1@18.9,70.725 ; R710.1@18.425,70.25 R710.1@18.9,70.725 ; R710.1@18.425,70.25 18.425,70.275 R710.1@18.9,70.75 ; R710.1@18.9,70.725 R710.1@18.9,70.75
pads on no net: J1.A J3. J4. J6. U101.10 U101.11 U101.12 U101.13 U201.6 U201.8 U202.4 U202.5 U202.6 U301.11 U301.12 U301.13 U302.10 U302.11 U302.12 U302.13 U501.6 U501.8 U501.9 U501.10 U501.11 U501.12 U501.13 U503.2 U503.4 U503.5 U503.10 U503.11 U503.13 U703.1 U703.2 U703.4 U703.5 U703.6 U703.7 U703.10 U703.11 U703.13 U901.1 U901.4
copper on no net:
  other v3: 101.35,58.35 7.9,65.3 101.35,67.45 7.9,74.4

## Polygon pours and split planes (outlines as drawn)
GND on Bottom Layer "GND_L04_P041" (solid, remove dead copper, pour order 41): 69,56 76.75,56 76.75,53 69,53
GND on Bottom Layer "GND_L04_P012" (solid, remove dead copper, pour order 12): 46.75,35.75 46.75,30.25 44.25,30.25 44.25,31.75 43.25,31.75 43.25,34.898 44.152,35.8 44.202,35.75
GND on Bottom Layer "GND_L04_P042" (solid, remove dead copper, pour order 42): 61,60.5 67.5,60.5 67.5,57.25 61,57.25
GND on Bottom Layer "GND_L04_P038" (solid, remove dead copper, pour order 38): 32.5,43 36.5,43 36.5,40 34.25,40 32.5,41.75
GND on Bottom Layer "GND_L04_P018" (solid, remove dead copper, pour order 18): 36.3,55.8 30.2,55.8 26.9,52.5 26.9,50.6 30.5,50.6 30.5,52.5 36.1,52.5 36.1,49 36.127,48.973 39.643,48.973 39.643,52.457
GND on Bottom Layer "GND_L04_P017" (solid, remove dead copper, pour order 17): 46,47.095 44.4,49 42.9,49 42.9,48 41.5,46.6 41.5,43.6 46,43.6
GND on Bottom Layer "GND_L04_P016" (solid, remove dead copper, pour order 16): 48.9,50.5 44.4,50.5 44.4,49 45.75,46.75 48.9,46.75
GND on Bottom Layer "GND_L04_P039" (solid, remove dead copper, pour order 39): 73.75,42.75 77,42.75 77,44.5 83,44.5 83,41.75 79.75,41.75 79.75,36.5 73.75,36.5
GND on Bottom Layer "GND_L04_P052" (solid, remove dead copper, pour order 52): 63,34.55 63,32.25 67,32.25 67,34.55
GND on Bottom Layer "GND_L04_P010" (solid, remove dead copper, pour order 10): 59.75,35.5 54.75,35.5 54.75,30 59.75,30 59.75,35.25
GND on Bottom Layer "GND_L04_P011" (solid, remove dead copper, pour order 11): 53,35.75 53,30.25 50.5,30.25 50.5,31.75 49.5,31.75 49.5,34.898 50.402,35.8 50.452,35.75
GND on Bottom Layer "GND_L04_P053" (solid, remove dead copper, pour order 53): 32.5,26.75 34.5,26.75 34.5,24.25 36.25,24.25 36.25,22.75 32.5,22.75
GND on Bottom Layer "GND_L04_P051" (solid, remove dead copper, pour order 51): 69,30.5 69,32.5 65,32.5 65,30.5
GND on Bottom Layer "GND_L04_P050" (solid, remove dead copper, pour order 50): 74.5,26.75 77.25,26.75 77.25,24 74.5,24
GND on Bottom Layer "GND_L04_P049" (solid, remove dead copper, pour order 49): 20.5,28 25.75,28 25.75,22.5 20.5,22.5
GND on Bottom Layer "GND_L04_P048" (solid, remove dead copper, pour order 48): 22,38.25 22,34 27,34 27,38.25
GND on Bottom Layer "GND_L04_P047" (solid, remove dead copper, pour order 47): 10.5,47.25 14.25,47.25 14.25,43.25 10.5,43.25
GND on Bottom Layer "GND_L04_P046" (solid, remove dead copper, pour order 46): 11.25,29 11.25,27.25 14.75,27.25 14.75,29
GND on Bottom Layer "GND_L04_P045" (solid, remove dead copper, pour order 45): 52.25,46.2 52.25,43.95 55.862,43.95 55.862,46.2
GND on Bottom Layer "GND_L04_P044" (solid, remove dead copper, pour order 44): 54.5,48 54.5,45.75 58.25,45.75 58.25,48
GND on Bottom Layer "GND_L04_P040" (solid, remove dead copper, pour order 40): 87.5,40 96.5,40 96.5,37.5 87.5,37.5
GND on Bottom Layer "GND_L04_P024" (solid, remove dead copper, pour order 24): 79.25,35.5 84.5,35.5 84.75,35.25 84.75,32.75 87,32.75 87,31 84.5,31 81,31 81,33.5 79.25,33.5
GND on Bottom Layer "GND_L04_P019" (solid, remove dead copper, pour order 19): 92.5,26.5 92.5,23.5 86,23.5 86,26.5
GND on Bottom Layer "GND_L04_P015" (solid, remove dead copper, pour order 15): 52.2,39.1 47.6,39.1 47.6,41.3 48.7,41.3 48.7,43.6 52.2,43.6
GND on Bottom Layer "GND_L04_P013" (solid, remove dead copper, pour order 13): 65.5,42.75 63.5,42.75 60,39.25 62.75,39.25 65.5,42
GND on Top Layer "GND_L01_P020" (solid, remove dead copper, pour order 20): 38.25,29.5 38.25,25 27,25 27,29.5
GND on Top Layer "GND_L01_P033" (solid, remove dead copper, pour order 33): 62.5,27.25 66.5,27.25 66.5,28.25 71,28.25 71,23.75 62.5,23.75
GND on Top Layer "GND_L01_P028" (solid, remove dead copper, pour order 28): 21.75,37.25 23.75,37.25 25,36 25,32.5 21.75,32.5
GND on Top Layer "GND_L01_P032" (solid, remove dead copper, pour order 32): 87,40 96.5,40 96.5,37.25 87,37.25
GND on Top Layer "GND_L01_P027" (solid, remove dead copper, pour order 27): 15.25,35.5 21.25,35.5 21.25,34 15.25,34
GND on Top Layer "GND_L01_P025" (solid, remove dead copper, pour order 25): 1.25,33.5 9.75,33.5 9.75,30 1.25,30
GND on Top Layer "GND_L01_P022" (solid, remove dead copper, pour order 22): 73.75,36.75 79.75,36.75 79.75,41.5 83.5,41.5 83.5,44.75 75.75,44.75 75.75,40.75 73.75,40.75
GND on Top Layer "GND_L01_P026" (solid, remove dead copper, pour order 26): 7.5,41.25 11,41.25 11,38 7.5,38
GND on Top Layer "GND_L01_P054" (solid, remove dead copper, pour order 54): 94.25,25 98.75,25 98.75,21.75 94.25,21.75
GND on Top Layer "GND_L01_P043" (solid, remove dead copper, pour order 43): 61.5,60.75 65.25,60.75 65.25,57.25 61.5,57.25
+12 on Top Layer "+12_L01_P037" (solid, pour order 37): 87,45 92.25,45 92.25,40.25 87,40.25
GND on Top Layer "GND_L01_P036" (solid, remove dead copper, pour order 36): 20,27.25 25.25,27.25 26.5,26 26.5,21.75 24.5,21.75 19.95,26.3
GND on Top Layer "GND_L01_P035" (solid, remove dead copper, pour order 35): 13,28.75 15,28.75 18.25,25.5 20.25,25.5 24,21.75 18.75,21.75 13,27.5
GND on Top Layer "GND_L01_P034" (solid, remove dead copper, pour order 34): 10.25,25.25 14.75,25.25 16.354,23.646 14.708,22 10.25,22
GND on Top Layer "GND_L01_P031" (solid, remove dead copper, pour order 31): 11.75,52.75 11.75,49.75 17.5,49.75 17.5,52.75
GND on Top Layer "GND_L01_P030" (solid, remove dead copper, pour order 30): 33.25,41.5 39.25,41.5 39.25,40 33.25,40
GND on Top Layer "GND_L01_P029" (solid, remove dead copper, pour order 29): 35.25,47 38.25,47 38.25,44 35.25,44
GND on Top Layer "GND_L01_P023" (solid, remove dead copper, pour order 23): 48.25,44.5 53,44.5 53,38.25 48.25,38.25
GND on GND "GND_L02_P007" (solid, remove dead copper, pour order 7): 3.414,20 cw(c3.414,23.414) 0,23.414 0,72 0,72.186 cw(c3.414,72.186) 3.414,75.6 106.5,75.6 106.586,75.6 cw(c106.586,72.186) 110,72.186 110,72 110,23.414 cw(c106.586,23.414) 106.586,20 106.5,20
+12 on PWR "+12_L03_P055" (solid, remove dead copper, pour order 55): 108.75,29.75 108.75,46.75 88.5,46.75 81.5,53.75 12,53.75 9.75,51.5 9.75,43.75 2.683,43.75 1.5,42.567 1.5,30.75 7,30.75 10.5,27.25 10.5,22.5 21,22.5 21.25,22.75 21.25,31 57.528,31 57.5,30.973 57.5,22.556 75.694,22.556 75.75,22.5 75.783,22.533 75.783,29.383

## Other copper
Top Layer:
  pour cut-out: 0,75.5 0,53.5 28,53.5 35.5,61 88.75,61 96.25,53.5 110,53.5 110,75.5
GND:
  pour cut-out: 110,53.75 96,53.75 88.75,61 35.5,61 28.25,53.75 0,53.75 0,75.5 110,75.5
PWR:
  pour cut-out: 110,53.75 96,53.75 88.75,61 35.5,61 28.25,53.75 0,53.75 0,75.5 110,75.5
  pour cut-out: 18.253,49.888 18.414,50.085 18.797,50.085 19.87,50.085 20.429,49.526 20.429,48.129 19.9,47.6 18.444,47.6 17.944,48.099 17.944,49.579
Bottom Layer:
  pour cut-out: 0,75.5 0,53.5 28,53.5 35.5,61 88.75,61 96.25,53.5 110,53.5 110,75.5

## Silkscreen, mask and mechanical layers (free items; w line width, h text height)
Top Overlay:
  lines w0.25: 0.25,53.75 28.25,53.75 35.5,61 88.75,61 96,53.75 110.25,53.75 ; 0.25,57.75 26.5,57.75 33.75,65 90.25,65 97.5,57.75 110.25,57.75 ; 0.5,64.5 10.75,64.5 ; 5.5,54.25 6,53.75 ; 5.5,57.25 5.93,57.68 ; 6,54.75 6,57.61 ; 6,57.36 6.07,57.43 ; 6,57.75 6,53.75 ; 6.07,57.68 6.5,57.25 ; 6.5,54.25 6,53.75 ; 10.75,57.75 10.75,75.25 ; 55,61.5 55.5,61 ; 55,64.5 55.43,64.93 ; 55.5,65 55.5,61 ; 55.57,64.93 56,64.5 ; 56,61.5 55.5,61 ; 99.75,57.75 99.75,75 ; 105,54.25 105.5,53.75 ; 105,57.25 105.43,57.68 105.5,57.68 105.57,57.68 106,57.25 ; 105.5,57.75 105.5,53.75 ; 106,54.25 105.5,53.75 ; 105.5,53.75 105.5,53.75
  text "Discharge Relay" at 98.067,72.748 h2.5 r270
  text "TS+" at 107.5,72.748 h2.5 r270
  text "R_Dsch-" at 1.208,72.498 h2.5 r270
  text "Andreu Senis & Guillem Ropero" at 32.245,71.275 h2.5
  text "TSAL Control v2.1" at 62.577,71 h2.5
  text "TS" at 17.506,69.5 h7
  text "TS" at 91.506,66.25 h7
  text "R_Dsch+" at 106.958,64.748 h2.5 r270
  text "TS-" at 0.75,61.998 h2.5 r270
  text "4 mm" at 55,61.75 h1.7 r90
  text "4 mm" at 104.75,54.5 h1.7 r90
  text "4 mm" at 5.5,54.25 h1.7 r90
  text "LV" at 81.506,48.25 h7
  text "GND" at 78.5,21.25 h2 r90
  text "SC END" at 86.75,21.002 h2 r90
Bottom Overlay:
  drawing of 64 lines, arcs and shapes, not listed
  text "4 mm" at 56.5,61.5 h1.7 r270
  text "TS" at 15.244,58.75 h7
  text "LV" at 87.744,56 h7
  text "4 mm" at 106.5,54.25 h1.7 r270
  text "4 mm" at 7,54 h1.7 r270
  text "I'm doing" at 8.749,40.145 h1.2
  text "the new version of" at 8.75,39 h1.2
  text "TSAL Control again..." at 8.749,37.895 h1.2
Mechanical 1:
  lines w1: 0,72 0,23.414 ccw(c3.414,23.414) 3.414,20 106.5,20 ; 0,72.186 cw(c3.414,72.186) 3.414,75.6 106.5,75.6 ; 106.586,20 ccw(c106.586,23.414) 110,23.414 110,72 ; 106.586,75.6 cw(c106.586,72.186) 110,72.186

## Text inside footprints (layer, text, board x,y; h text height)
U901: Top Overlay "6.35mm" at 63.5,62 h1.7 r90